# Altium PCB PCB2.PcbDoc
Units mil, origin at the board's own origin, x right, y up, seen from the top; angles counter-clockwise.
Board outline 957.48 x 1094.49 mil, 2 copper layers (Top Layer, Bottom Layer); 12 components, 6 nets, 36 pads, 0 vias.
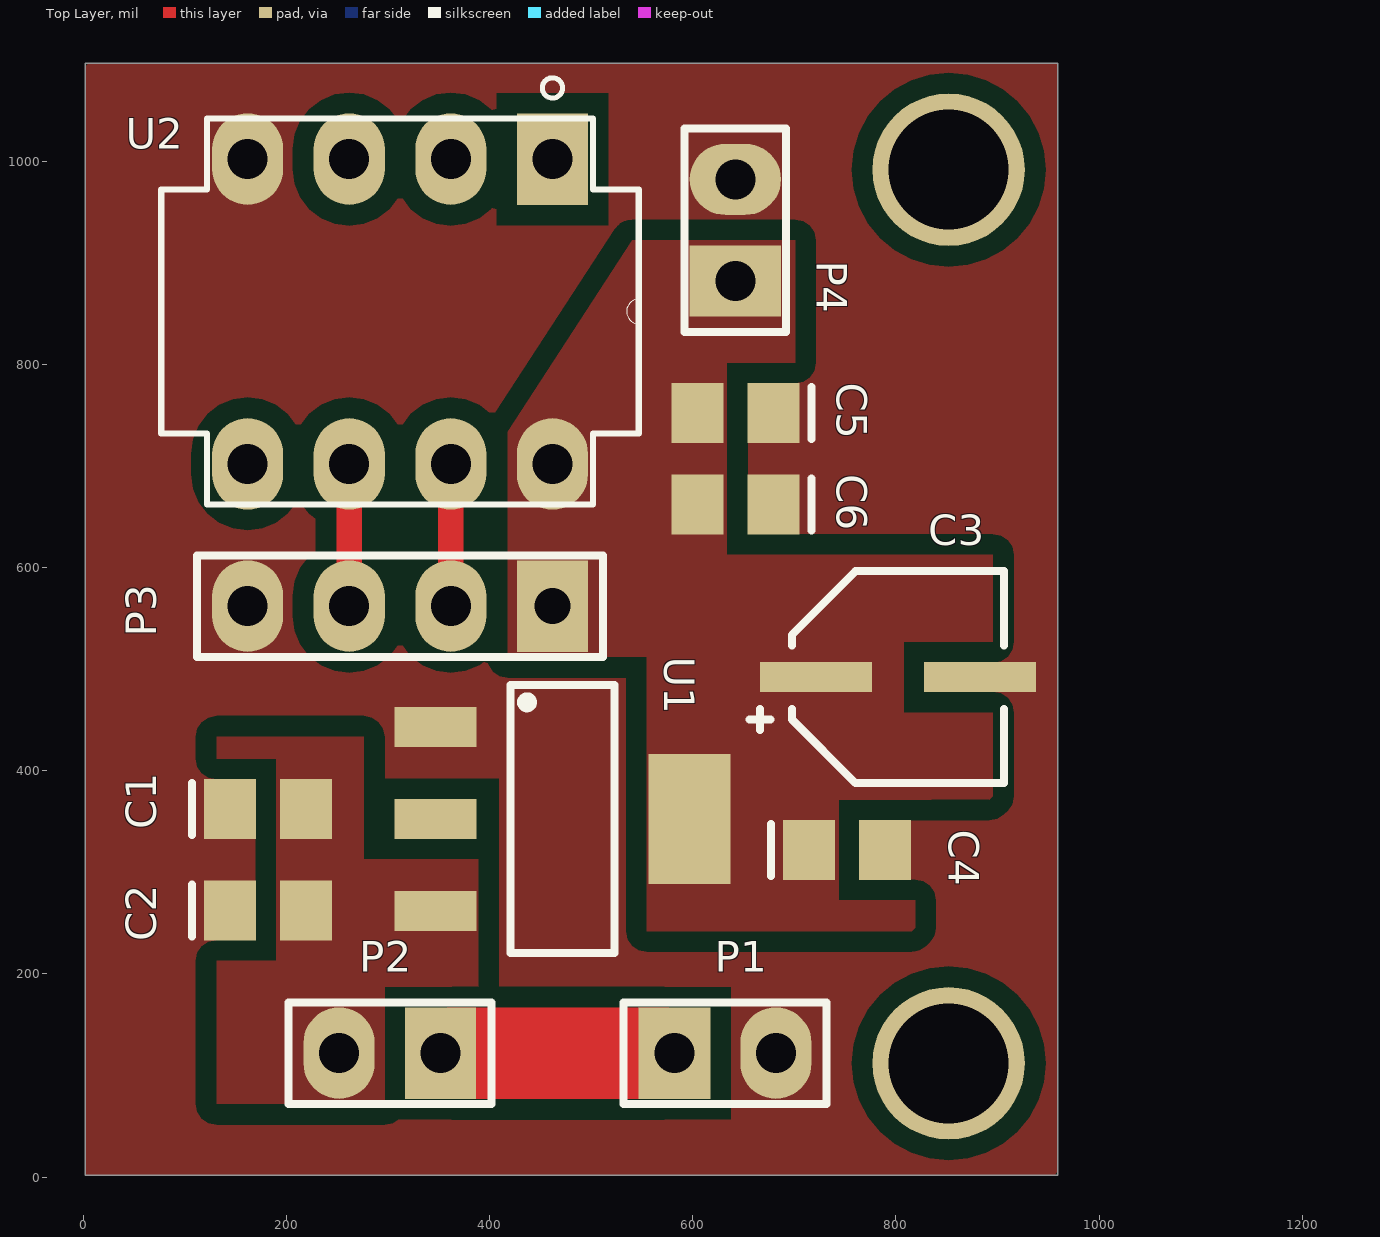
[diagram p0: Top Layer view]
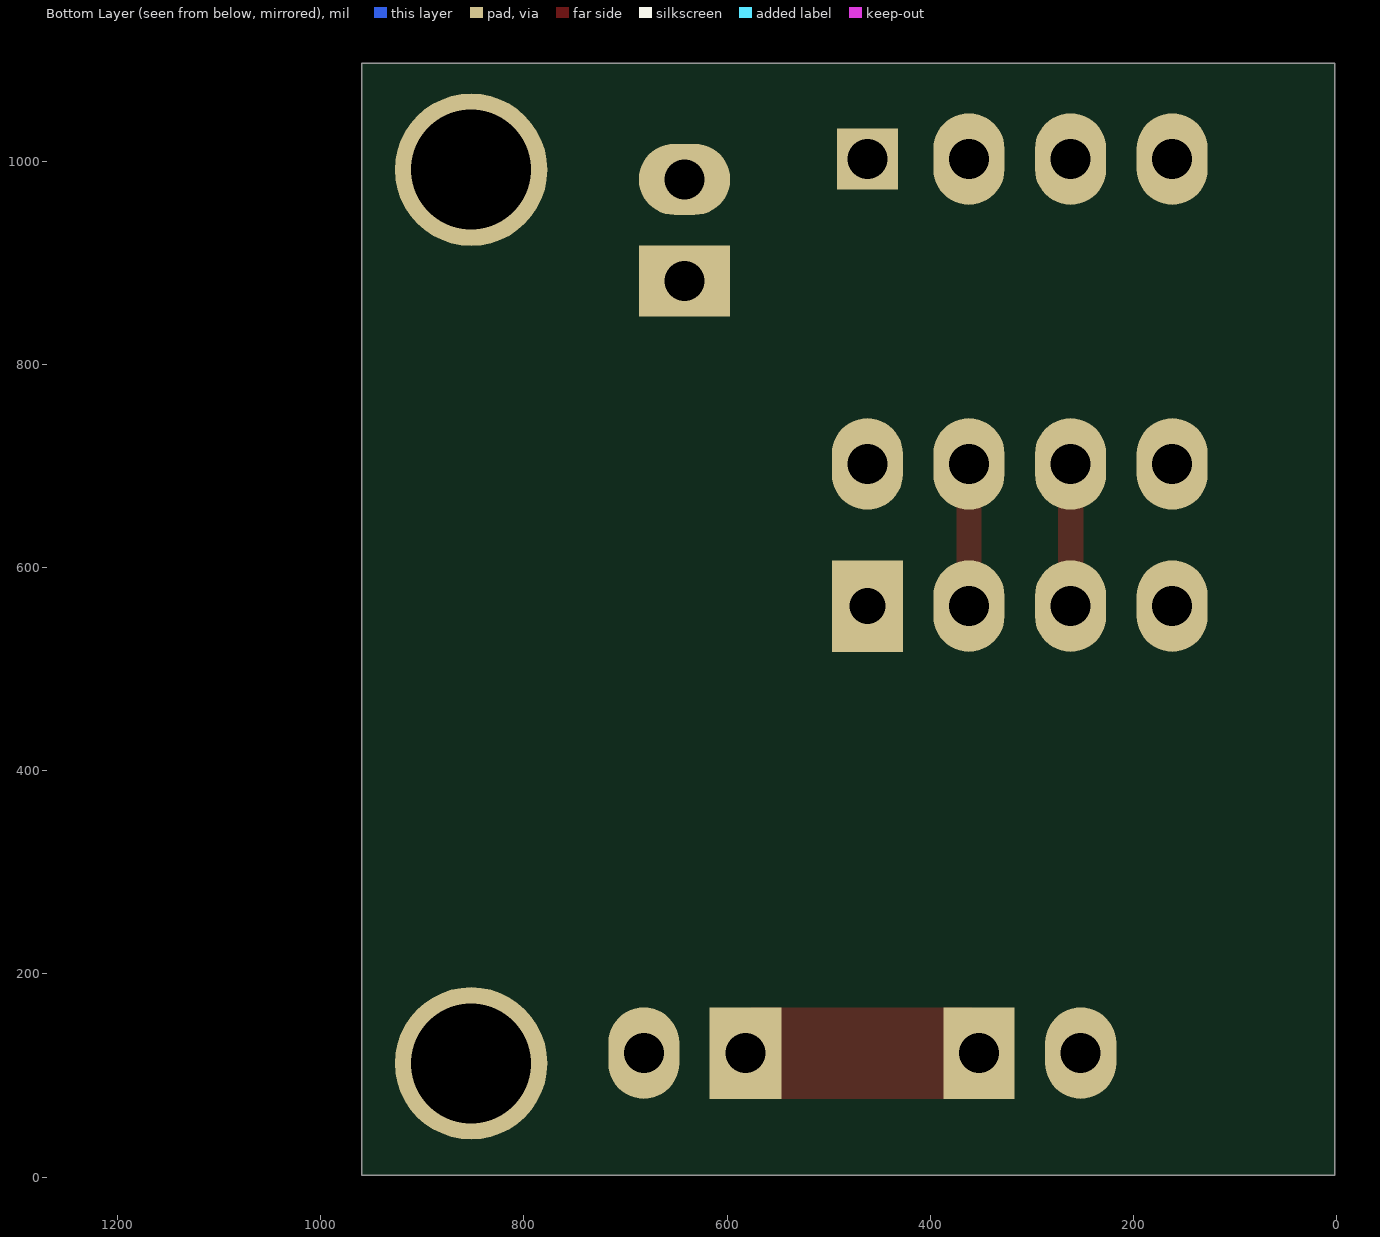
[diagram p1: Bottom Layer view, seen from below]
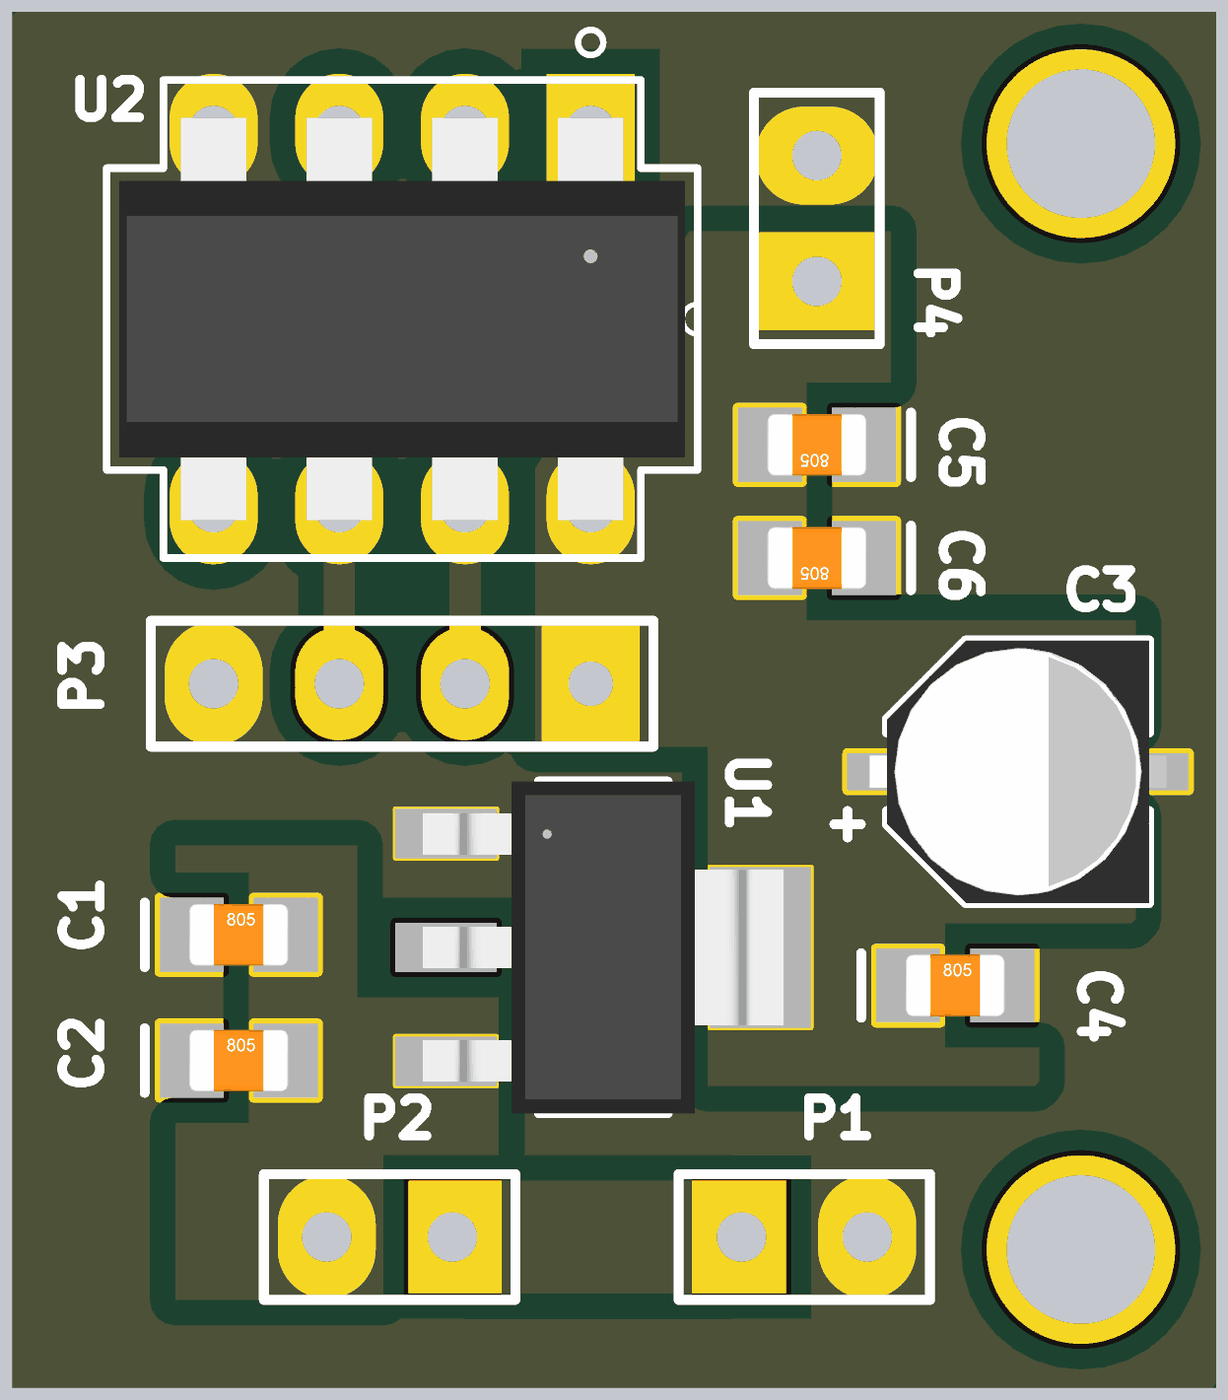
[diagram p2: 3D render of the assembled board from above, using the file's embedded part models]

## Layer stack, top to bottom
Top Solder: solder mask 0.4, Solder Resist, Dk 3.5
Top Layer: signal copper 1.4
Dielectric 1: dielectric 12.6, FR-4, Dk 4.8
Bottom Layer: signal copper 1.4
Bottom Solder: solder mask 0.4, Solder Resist, Dk 3.5

## Board outline
2,2 2,1096.49 959.48,1096.49 959.48,2

## Design rules (kind name [scope] priority, off if disabled: settings)
Clearance [All] p1: gap=20 ignorepadtopadclearanceinfootprint=TRUE
PlaneConnect [All] p1: planeconnectstyle=Direct reliefexpansion=20 reliefentries=4 reliefconductorwidth=10 reliefairgap=10
PolygonConnect [All] p1: connectstyle=Direct reliefconductorwidth=30 reliefentries=4 polygonreliefangle="90 Angle" airgapwidth=15
RoutingVias [All] p1: holewidth=28 width=50 viastyle="Through Hole" minholewidth=28 minwidth=50 maxholewidth=28 maxwidth=50
SilkToSilkClearance [All] p1 off: silktosilkclearance=10
SilkToSolderMaskClearance [IsPad] p1 off: minsilkscreentomaskgap=10 clearancetoexposedcopper=TRUE
SolderMaskExpansion [All] p1: expansion=4
Width Width_9V [InNet('9V')] p1: maxlimit=100 minlimit=40 preferedwidth=80
Width [All] p2: maxlimit=30 minlimit=10 preferedwidth=20
27 further rules are at their usual default settings.

## Components (designator, comment, footprint, x,y, rotation, side; value= is the part's Value field where it differs from the comment)
C1 "Capacitor" C2012[0805] 182,362.31 r0 top value=100nF
C2 "Capacitor" C2012[0805] 182,262.31 r0 top value=10uF
C3 "Capacitor Pol" Cap_Al_SMD_B6_5.3x5.3mm 802,492 r180 top value="10uF 50V"
C4 "Capacitor" C2012[0805] 752,322 r0 top value=100nF
C5 "Capacitor" C2012[0805] 642,752 r180 top value=10nF
C6 "Capacitor" C2012[0805] 642,662 r180 top value=10uF
P1 "Pilha 9V" HDR1X2#1 582,122 r0 top
P2 "Chave" HDR1X2#2 352,122 r180 top
P3 "Saida_Voz" HDR1X4 462,562 r180 top
P4 "Saida_Amp" HDR1X2#2 642,882 r90 top
U1 "LM1117MPX-2.5/NOPB" DCY0004A_N 472,352.31 r0 top
U2 "ATTINY85-20PU" 8P3_ATM 462,1002 r270 top

## Footprints (in the part's own frame and the unit in brackets; to place one, negate y for a bottom-side part, rotate by r counter-clockwise, add the part's x,y. Pads: shape width x height; smd on the part's side, far side on the other; paste and mask are expansions set on the pad)
8P3_ATM [mil]
  rect 90x70 / inner rect 60x60 / far side rect 60x60 hole 39.37 mask+0: 1(0,0)
  oval 90x70 hole 39.37 mask+0: 2(0,-100) 3(0,-200) 4(0,-300) 5(300,-300) 6(300,-200) 7(300,-100) 8(300,0)
  silkscreen extent -80,-385 340,85, body extent -10,-375 310,75, height 205
C2012[0805] [mm] "Chip Capacitor; Body 2.0 x 1.2 mm (LxW typ)"
  rect 1.3x1.5 smd: 1(-0.95,0) 2(0.95,0)
  silkscreen extent -1.9,-0.65 -1.9,0.65, body extent -1,-0.62 1,0.63, height 0.8
Cap_Al_SMD_B6_5.3x5.3mm [mm]
  rect 2.8x0.75 smd: 1(2.05,0) 2(-2.05,0)
  silkscreen extent -2.65,-2.65 3.71,2.65, body extent -3,-2.65 3,2.65, height 6.42
DCY0004A_N [mm]
  rect 2.05x1 smd paste+0 mask+0.051: 1(-3.175,2.3) 3(-3.175,-2.3)
  rect 2.05x1 smd paste+0: 2(-3.175,0)
  rect 2.05x3.25 smd paste+0 mask+0.051: 4(3.175,0)
  silkscreen extent -1.3,-3.35 1.3,3.35, body extent -3.64,-3.35 3.65,3.35, height 1.81
HDR1X2#1 [mil] "Connector; Header; 2 Position"
  rect 71x90 hole 39.37: 1(0,0)
  oval 70x90 hole 39.37: 2(100,0)
  silkscreen extent -50,-50 150,50
HDR1X2#2 [mil] "Connector; Header; 2 Position"
  rect 70x90 hole 39.37: 1(0,0)
  oval 70x90 hole 39.37: 2(100,0)
  silkscreen extent -50,-50 150,50
HDR1X4 [mil] "Connector; Header; 4 Position"
  rect 70x90 hole 35.43: 1(0,0)
  oval 70x90 hole 39.37: 2(100,0) 3(200,0) 4(300,0)
  silkscreen extent -50,-50 350,50

## Part data
C1 C2 C4 C5 C6: library part C, Package Type=0805
C3: library part CP, "Polarized Capacitor", Package Type=5.3x5.3
P1 P2 P4: library part "Header 2", "Header, 2-Pin", LatestRevisionDate=17-Jul-2002, LatestRevisionNote="Re-released for DXP Platform.", Publisher="Altium Limited"
P3: library part "Header 4", "Header, 4-Pin", LatestRevisionDate=17-Jul-2002, LatestRevisionNote="Re-released for DXP Platform.", Publisher="Altium Limited"
U1: "No Description Available", Mfr_Name="Texas Instruments", Copyright="Copyright (C) 2021 Ultra Librarian. All rights reserved.", Manufacturer_Part_Number=LM1117MPX-2.5/NOPB, RefDes=RefDes, Type=DEV
U2: "No Description Available", Mfr_Name=Microchip, Copyright="Copyright (C) 2021 Ultra Librarian. All rights reserved.", Manufacturer_Part_Number=ATTINY85-20PU, RefDes=RefDes, Type=DEV

## Free pads (board coordinates)
  round 150 hole 118.11: 3(852,991.5) 4(852,112)

## Nets (pads, with @x,y where several pads share a name; then routed paths per layer and width w, separated by ;. In a path a pad name is that pad's centre, name@x,y a point inside that pad or via, vN(x,y) a via of type N, cw(c..) or ccw(c..) an arc to the next point about the centre after c; other vN are vias at no path point)
5V: C3.1 C4.1 C5.2 C6.2 P3.1 P4.1 U1.4 U2.8
9V: P1.1 P2.1 | length 209
  Top Layer w90: P2.1@363,122 P1.1@572,122
GND: C1.1 C2.1 C3.2 C4.2 C5.1 C6.1 P1.2 P3.4 P4.2 U1.1 U2.4
PLAYE: P3.3 U2.6 | length 140
  Top Layer w25: P3.3 U2.6
REC: P3.2 U2.7 | length 140
  Top Layer w25: P3.2 U2.7
REG_IN: C1.2 C2.2 P2.2 U1.3
pads on no net: U1.2 U2.1 U2.2 U2.3 U2.5

## Polygon pours and split planes (outlines as drawn)
5V on Top Layer "Top Layer-5V" (solid, pour order 41): 540.51,922 701,922 701,612.47 895.52,612.47 895.52,371.5 819,371.5 819,245.54 815.47,242 555,242 555,512 418,512 418,733.63
REG_IN on Top Layer "Top Layer-REG_IN" (solid, pour order 47): 131.5,433.5 276.36,433.5 276.36,312.79 389,312.79 389,187.31 297,187.31 297,72 131.5,72
GND on Top Layer "Top Layer-GND" (solid, pour order 57): 2,1096.5 2,2 959.48,1.99 959.48,1096.49

## Other copper
Top Layer:
  pour cut-out: 411.5,181.5
  pour cut-out: 409.39,187.31 409.39,392 407.35,392 407.35,187.31
  pour cut-out: 407.35,321.16
  pour cut-out: 407.35,321.16
  pour cut-out: 196,402
  pour cut-out: 195,402
  pour cut-out: 1052,407
  pour cut-out: 1042,387
  pour cut-out: 292,397
  pour cut-out: 1232,602
  pour cut-out: 1072,642
  pour cut-out: 757,382
  pour cut-out: 752,362
  pour cut-out: 536.65,436.29
  pour cut-out: 562,202
  pour cut-out: 1072,312

## Silkscreen, mask and mechanical layers (free items; w line width, h text height)
Mechanical 1:
  the board outline again, w10